# Altium PCB PCB2.PcbDoc
Units mil, origin at the board's own origin, x right, y up, seen from the top; angles counter-clockwise.
Board outline 6000 x 4000 mil, 2 copper layers (Top Layer, Bottom Layer); 7 components, 7 nets, 28 pads, 0 vias.
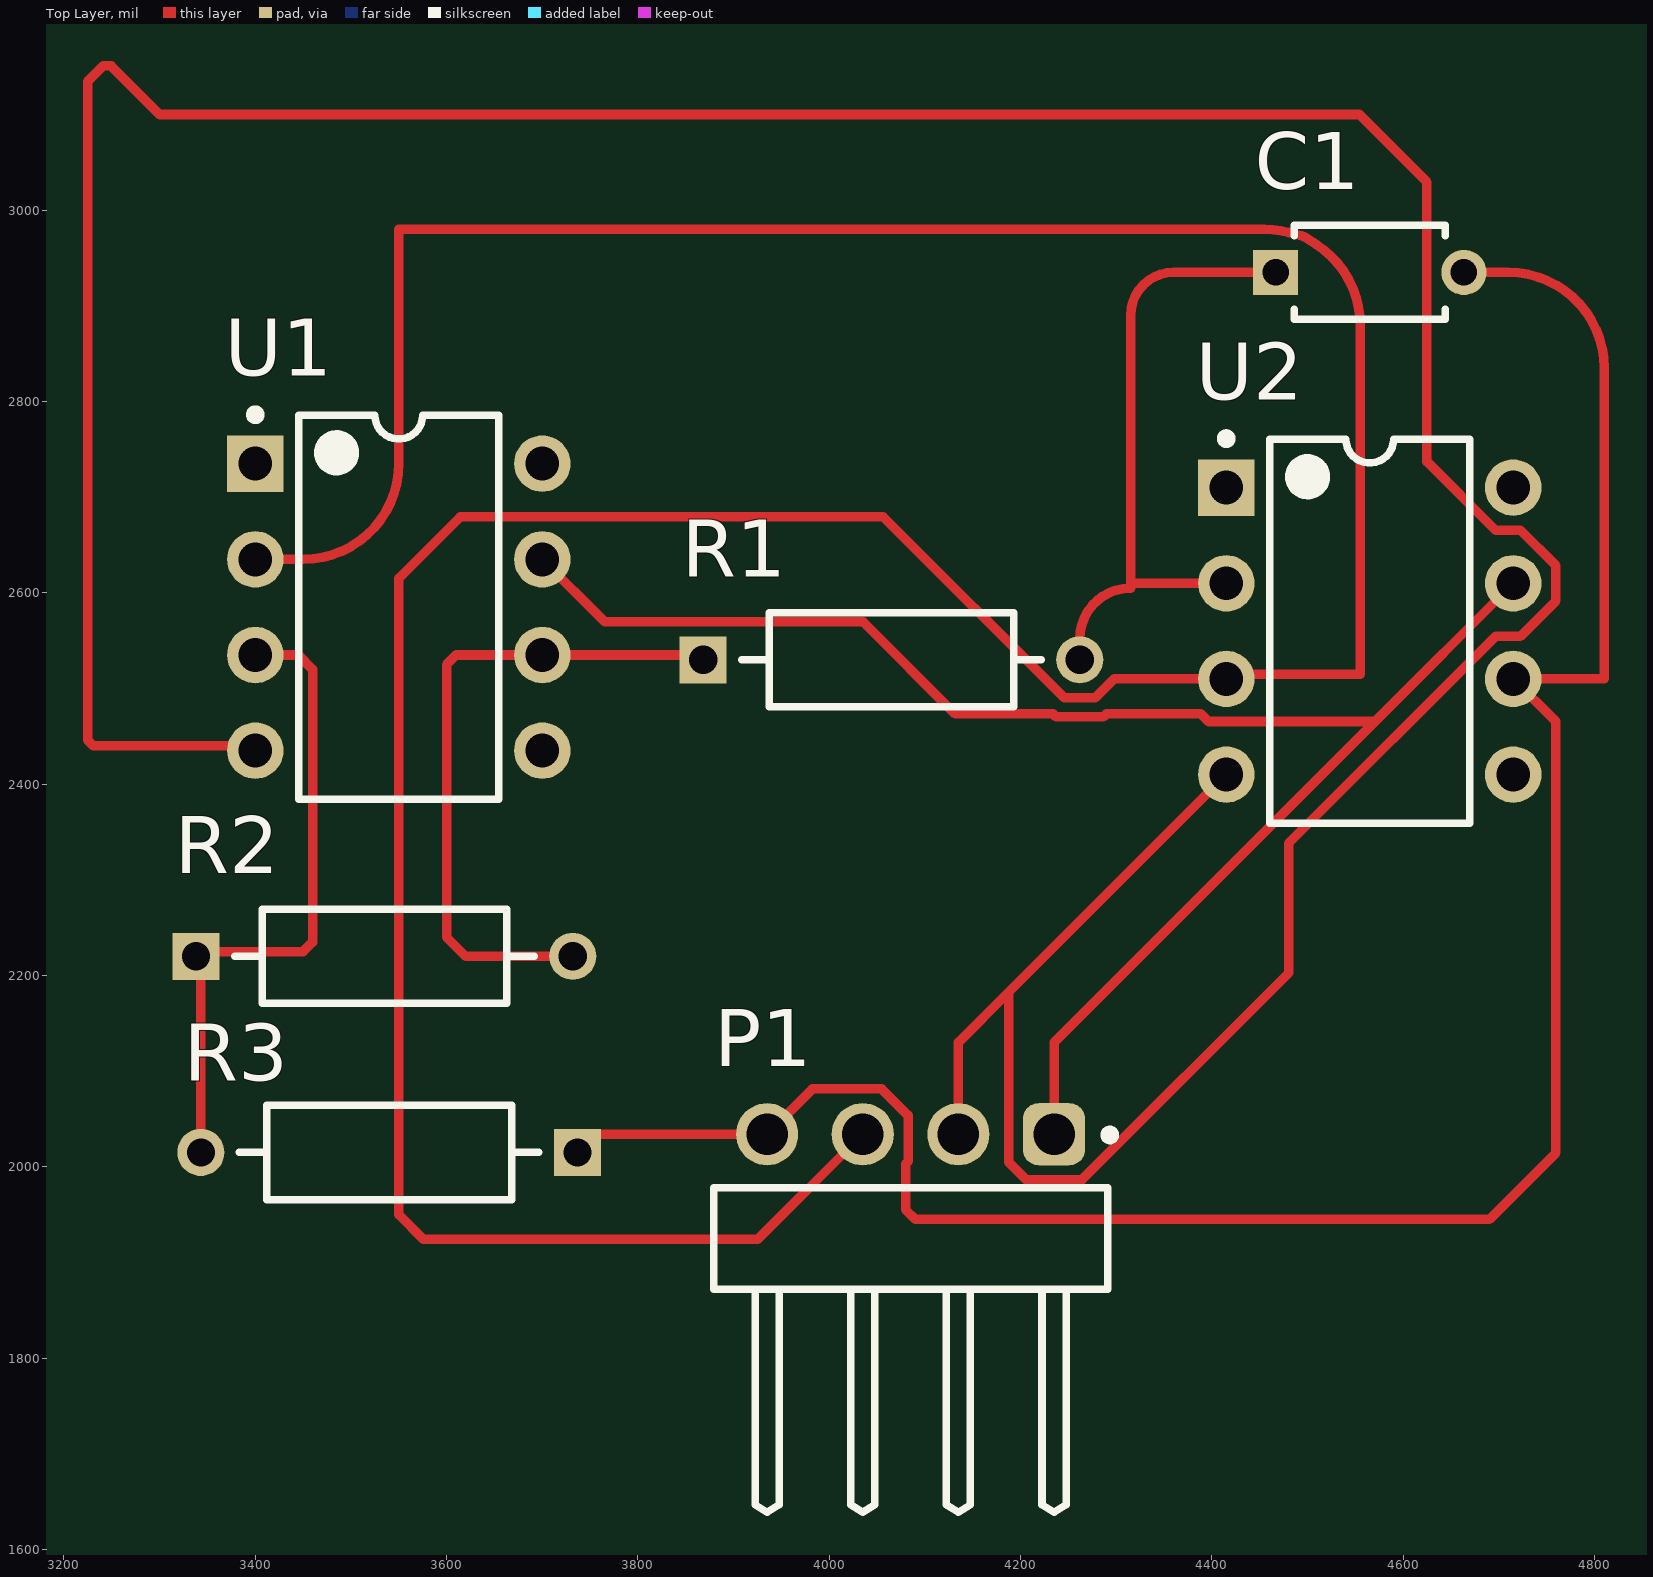
[diagram p0: Top Layer view]
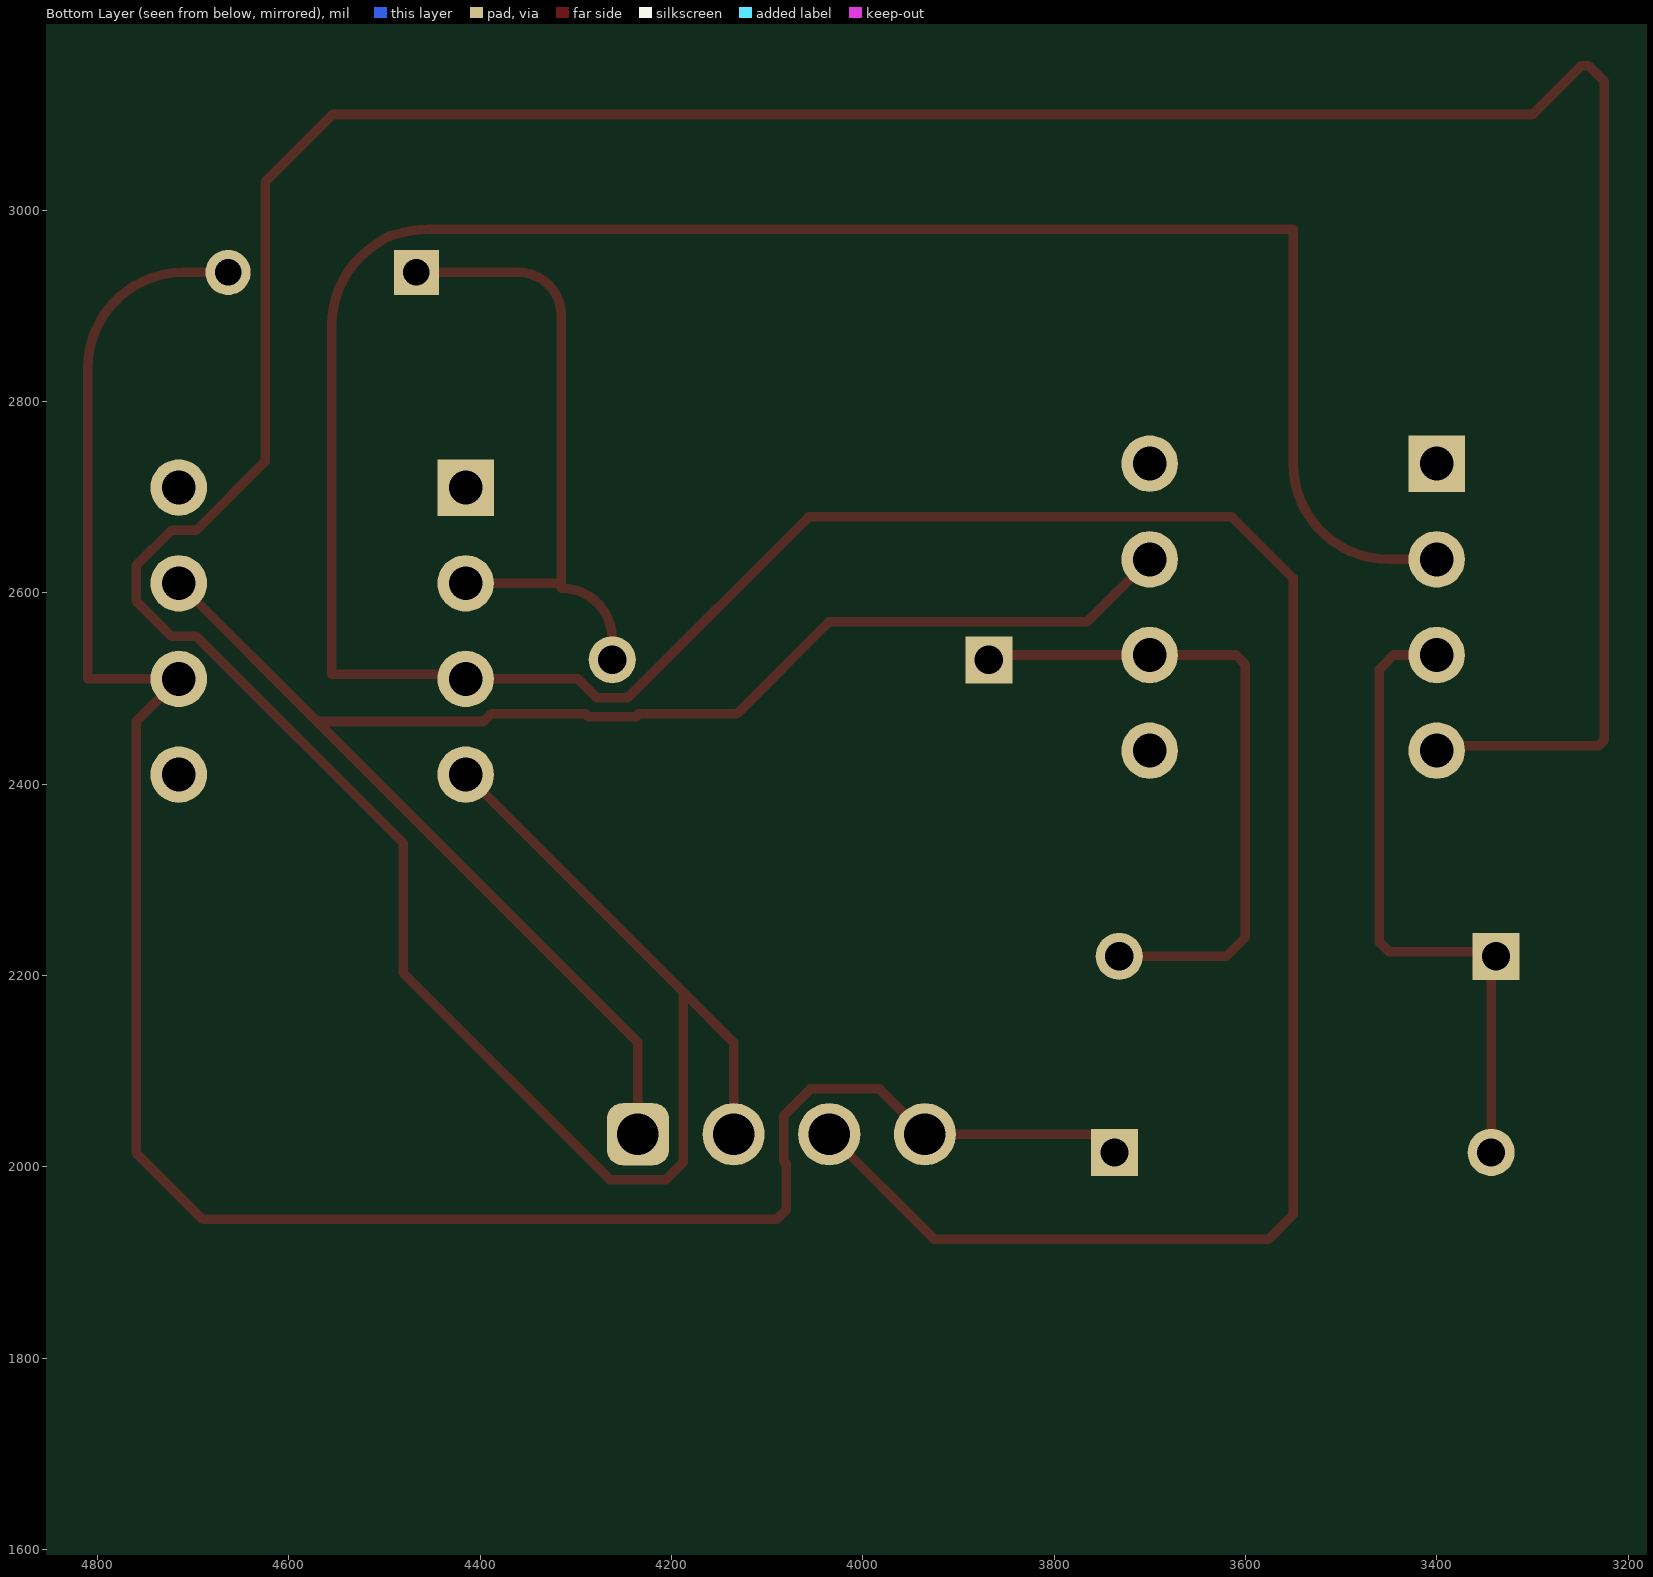
[diagram p1: Bottom Layer view, seen from below]
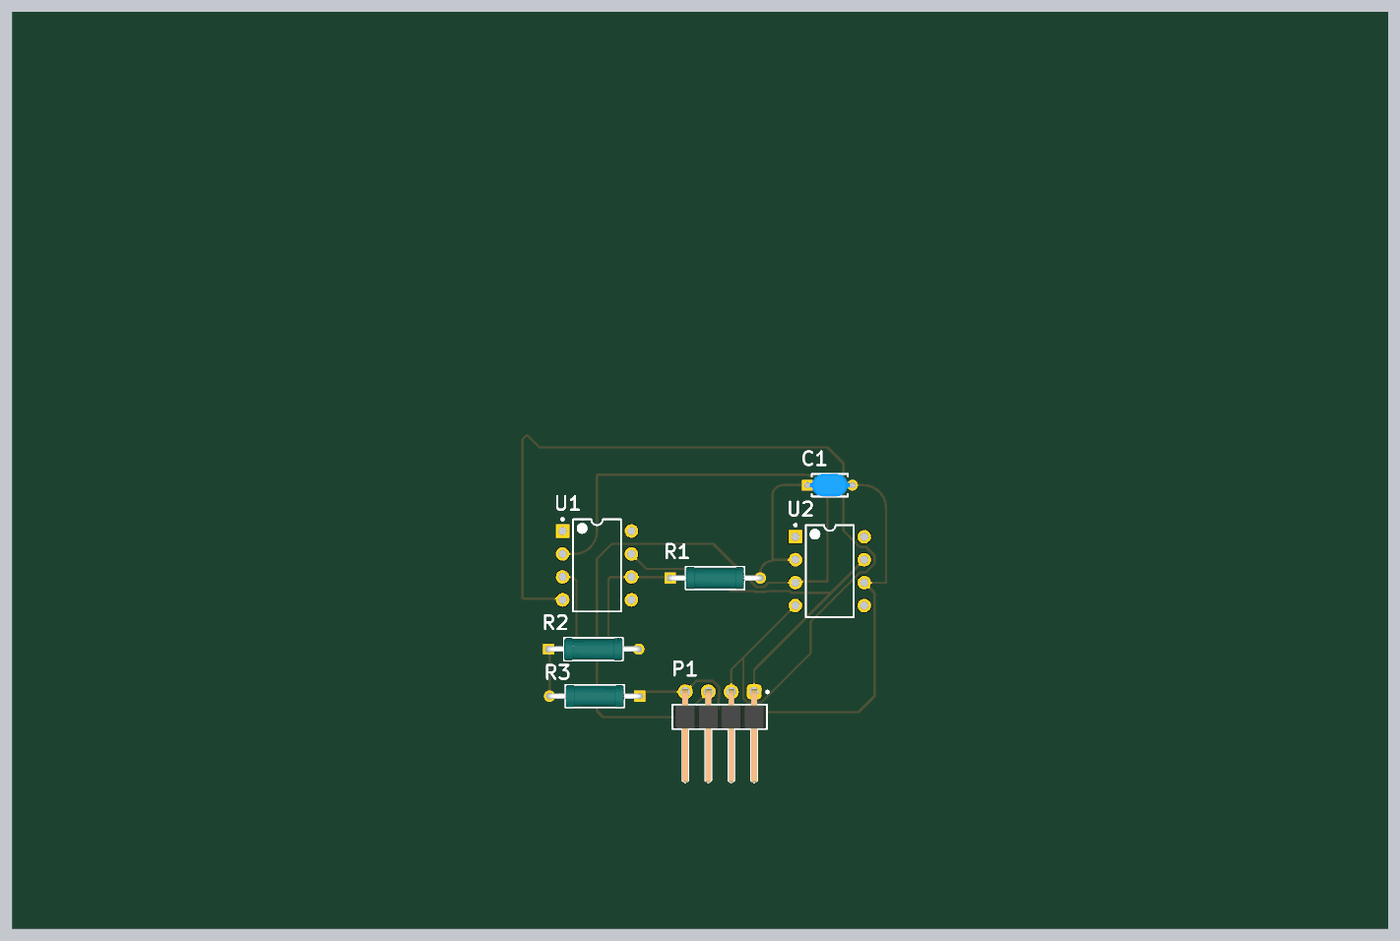
[diagram p2: 3D render of the assembled board from above, using the file's embedded part models]

## Layer stack, top to bottom
Top Solder: solder mask 0.4, Solder Resist, Dk 3.5
Top Layer: signal copper 1.4
Dielectric 1: dielectric 12.6, FR-4, Dk 4.8
Bottom Layer: signal copper 1.4
Bottom Solder: solder mask 0.4, Solder Resist, Dk 3.5

## Board outline
1000,1000 7000,1000 7000,5000 1000,5000

## Design rules (kind name [scope] priority, off if disabled: settings)
Clearance [All] p1: gap=10 ignorepadtopadclearanceinfootprint=FALSE
PolygonConnect [All] p1: connectstyle=Relief reliefconductorwidth=10 reliefentries=4 polygonreliefangle="90 Angle" airgapwidth=10
RoutingVias [All] p1: holewidth=28 width=50 viastyle="Through Hole" minholewidth=28 minwidth=50 maxholewidth=28 maxwidth=50
SolderMaskExpansion [All] p1: expansion=4 istentingtop=FALSE
SupplyNets "Schematic Supply Nets" [InNet('GND')] p1: voltage=0.000
Width [All] p1: maxlimit=10 minlimit=10 preferedwidth=10
30 further rules are at their usual default settings.

## Components (designator, comment, footprint, x,y, rotation, side; value= is the part's Value field where it differs from the comment)
C1 "0.1uF" FP-RDE0M1-MFG 4565,2935 r0 top
P1 "61300411021" 61300411021 4085,1925 r0 top
R1 "12K" FP-MRS25-MFG 4065,2530 r0 top
R2 "1K" FP-MRS25-MFG 3535,2220 r0 top
R3 "180" FP-MRS25-MFG 3540,2015 r180 top
U1 "LM741CN/NOPB" P0008A 3550,2585 r0 top
U2 "LM741CN/NOPB" P0008A 4565,2560 r0 top

## Footprints (in the part's own frame and the unit in brackets; to place one, negate y for a bottom-side part, rotate by r counter-clockwise, add the part's x,y. Pads: shape width x height; smd on the part's side, far side on the other; paste and mask are expansions set on the pad)
61300411021 [mm] "Pin Header, pitch 2.54 mm, THT, Angled, single row, 4p"
  rrect50% 1.65x1.65 hole 1.1: 1(3.81,2.77)
  round 1.65 hole 1.1: 2(1.27,2.77) 3(-1.27,2.77) 4(-3.81,2.77)
  silkscreen extent -5.23,-7.27 5.42,2.87, body extent -5.08,-7.27 5.08,3.09, height 2.58
FP-MRS25-MFG [mm]
  rect 1.25x1.25 hole 0.75 paste-2539.97 mask+0: 1(-5,0)
  round 1.25 hole 0.75 paste-2539.97 mask+0: 2(5,0)
  silkscreen extent -3.98,-1.25 3.98,1.25, body extent -5.72,-1.35 5.72,1.35, height 0.25
FP-RDE0M1-MFG [mm]
  rect 1.2x1.2 hole 0.7 paste-2539.97 mask+0: 1(-2.5,0)
  round 1.2 hole 0.7 paste-2539.97 mask+0: 2(2.5,0)
  silkscreen extent -2,-1.25 2,1.25, body extent -3.2,-1.35 3.2,1.35, height 0.25
P0008A [mm] "DIP, 8-Leads, Body 10.15x6.6mm, Pitch 2.54mm"
  rect 1.5x1.5 hole 0.9: 1(-3.81,3.81)
  round 1.5 hole 0.9: 2(-3.81,1.27) 3(-3.81,-1.27) 4(-3.81,-3.81) 5(3.81,-3.81) 6(3.81,-1.27) 7(3.81,1.27) 8(3.81,3.81)
  silkscreen extent -3.93,-5.1 2.65,5.23, body extent -3.95,-5.07 3.95,5.07, height 5.08

## Part data
C1: library part CMP-06035-051680-1, "Ceramic Capacitor 100nF ±10% 50V X7R Radial", Capacitance=100nF, Case/Package=Radial, Dielectric=X7R, Max Operating Temperature=125°C, Min Operating Temperature=-55°C, Package Quantity=2000, Resistor Type=Ceramic, Tolerance=10%, Voltage Rating=50V, Height=3.5mm, Height - Seated (Max)=0.236inch, Lead Diameter=0.5mm, Lead Free="Lead Free", Lead Pitch=0.197inch, Lead/Base Style=Kinked, Length=0.157inch, Mount="Through Hole", Packaging="Tape and Reel", Termination=Radial, Voltage Rating (DC)=50V, Width=3.5mm
P1: library part CMP-1502-01063-3, Color=Black, Contact Resistance=20mΩ, Current Rating=3A, Operating Supply Voltage=250V, Connector Type="Male Pin", Contact Material=Copper, Contact Mating Length=5.9944mm, Contact Plating=Gold, Gender=Male, Lead Pitch=2.54mm, Mount="Through Hole", NexarPartId=31153320, Number of Contacts=4, Number of Pins=4, Number of Positions=4, Number of Rows=1, Pitch=2.54mm, REACH SVHC=Unknown, RoHS=Compliant, Termination=Solder
R1 R2 R3: library part CMP-02408-000051-1, "RES 1K OHM 0.6W 1% AXIAL", Case/Package=Axial, Max Operating Temperature=155°C, Max Power Dissipation=600mW, Min Operating Temperature=-55°C, Package Quantity=5000, Resistance=1kR, Resistance Tolerance=1%, Resistor Type="Metal Film", Temperature Coefficient=50ppm/°C, Voltage Rating=350V, Construction=Cylindrical, Contact Plating=Tin, Diameter=2.5mm, Lead Diameter=0.6mm, Lead Free="Lead Free", Length=6.5mm, Military Standard=Not, Mount="Through Hole", Number of Pins=2, Number of Terminations=2, Packaging="Tape and Reel", Power Rating=600mW, Radiation Hardening=No, RoHS Compliant=Yes, Series=MRS25, Technology="THIN FILM", Termination=Axial, Tolerance=1%, Voltage Rating (DC)=350V, Weight=0.00776oz, Width=2.5mm
U1 U2: library part CMP-0055-00162-3, "Operational Amplifier, 8-pin MDIP, Pb-Free", Manufacturer="Texas Instruments", Package Reference=P0008A, PackageTopMarking=NSUZXYTTE#*LM*741CN, PowerWise=N, Code_JEDEC=MS-001-BA, ComponentLink1Description="Datasheet URL", ComponentLink1URL=http://www.ti.com/general/docs/lit/getliterature.tsp?genericPartNumber=LM741&fileType=pdf, CompType=Amplifiers, PackageDescription="MDIP, .365 x .250 x .130in, 8 Lead, .100in Pitch", PinCount=8, RoHS=Y

## Nets (pads, with @x,y where several pads share a name; then routed paths per layer and width w, separated by ;. In a path a pad name is that pad's centre, name@x,y a point inside that pad or via, vN(x,y) a via of type N, cw(c..) or ccw(c..) an arc to the next point about the centre after c; other vN are vias at no path point)
+vcc: P1.1 U1.7 U2.7 | length 1718
  Top Layer w10: U1.7 3765.39,2569.61 4035.55,2569.61 4131.64,2473.51 4234.04,2473.51 4237.16,2470.39 4286.54,2470.39 4289.66,2473.51 4388.51,2473.51 4396.56,2465.47 4570.47,2465.47 ; P1.1 4235,2130 4570.47,2465.47 ; U2.7 4570.47,2465.47
-VCC: P1.2 U1.4 U2.4 | length 4413.3
  Top Layer w10: U1.4 3395,2440 3230.86,2440 3225,2445.86 3225,3135 3240.86,3150.86 3249.14,3150.86 3300,3100 4554.14,3100 4624.8,3029.34 4624.8,2737.23 4696.56,2665.47 4722.5,2665.47 4759.53,2628.44 4759.53,2591.56 4722.5,2554.53 4696.56,2554.53 4480.37,2338.34 4480.37,2202.76 4264.18,1986.57 4205.82,1986.57 4187.52,2004.87 4187.52,2182.52 ; P1.2 4135,2130 4187.52,2182.52 ; U2.4 4187.52,2182.52
GND: P1.3 U1.2 U2.3 | length 4206.7
  Top Layer w10: U1.2 3450,2635 ccw(c3450,2735) 3550,2735 3550,2980 4455,2980 cw(c4455,2880) 4480.51,2976.69 4494.02,2973.13 cw(c4490.2,2958.62) 4498.47,2971.14 4510.12,2963.43 cw(c4455,2880) 4555,2880 4555,2515 4420,2515 ccw(c4420,2510) U2.3 4297.86,2510 4278.26,2490.39 4245.44,2490.39 4056.31,2679.53 3614.53,2679.53 3550,2615 3550,1950 3575.86,1924.14 3925.09,1924.14 P1.3
NetC1_1: C1.1 R1.2 U2.2 | length 657.6
  Top Layer w10: R1.2 4261.85,2551.85 cw(c4315,2551.85) 4315,2605 ; 4315,2610 4315,2890 cw(c4360,2890) 4360,2935 C1.1 ; 4320,2610 U2.2
NetC1_2: C1.2 P1.4 R3.1 U2.6 | length 2334.5
  Top Layer w10: R3.1 3755.91,2034.06 P1.4 3982.48,2081.54 4054.67,2081.54 4082.48,2053.72 4082.48,2005.6 4080,2003.12 4080,1955 4090,1945 4690,1945 4759.53,2014.53 4759.53,2465.47 U2.6 4810,2510 4810,2835 ccw(c4710,2835) 4710,2935 C1.2
NetR1_1: R1.1 R2.2 U1.6 | length 699.5
  Top Layer w10: R2.2 3620,2220 3600,2240 3600,2525 3610,2535 U1.6 3863.15,2535 R1.1
NetR2_1: R2.1 R3.2 U1.3 | length 686.3
  Top Layer w10: R3.2 3343.15,2215 R2.1 3343.15,2225 3450,2225 3460,2235 3460,2520 3445,2535 U1.3
pads on no net: U1.1 U1.5 U1.8 U2.1 U2.5 U2.8